# Altium PCB PCB.PcbDoc
Units mm, origin at the board's own origin, x right, y up, seen from the top; angles counter-clockwise.
Board outline 85.3 x 74.4 mm, 2 copper layers (Top Layer, Bottom Layer), stack 1.571 mm thick; 81 components, 60 nets, 260 pads, 57 vias.
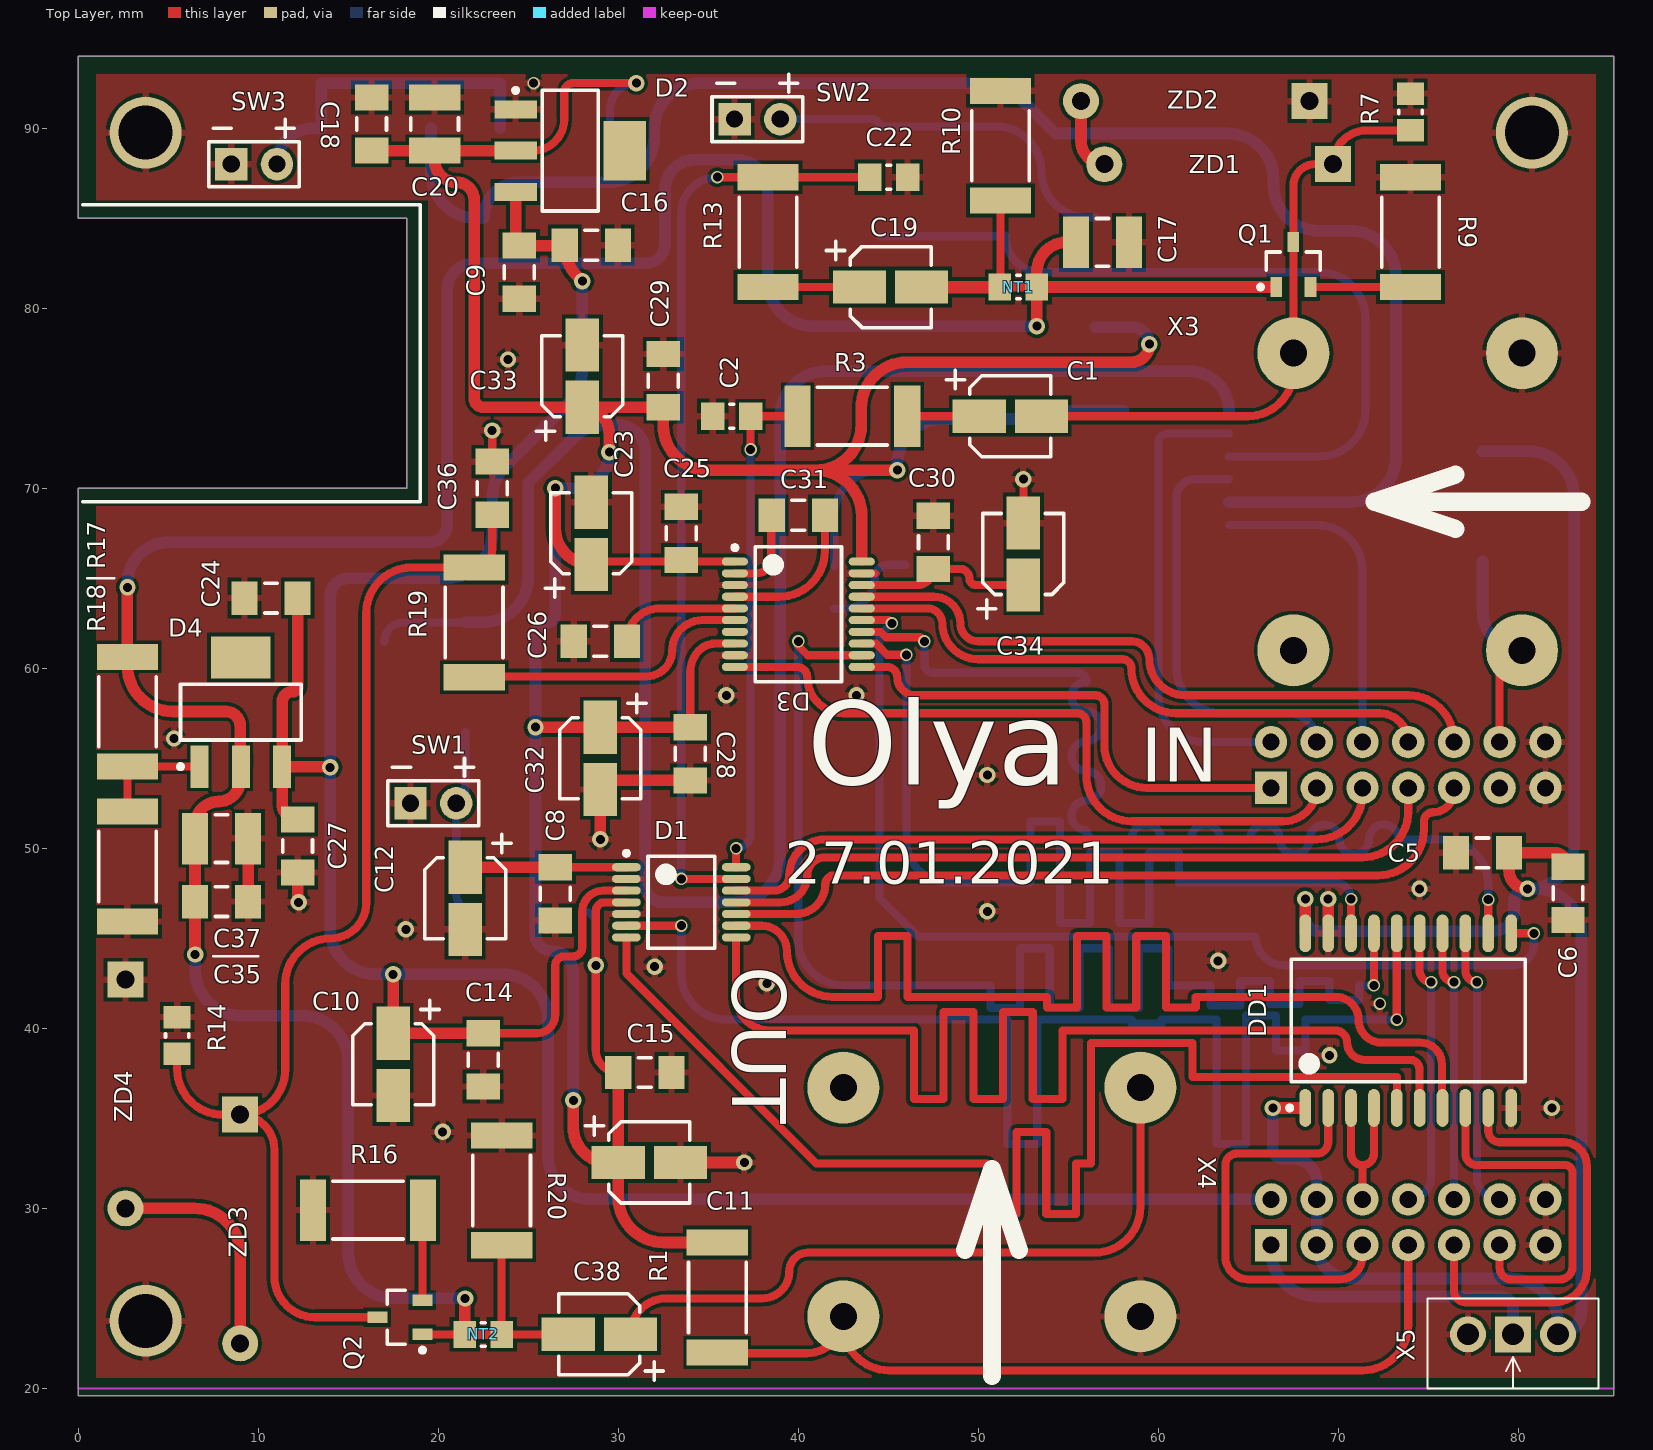
[diagram p0: Top Layer view]
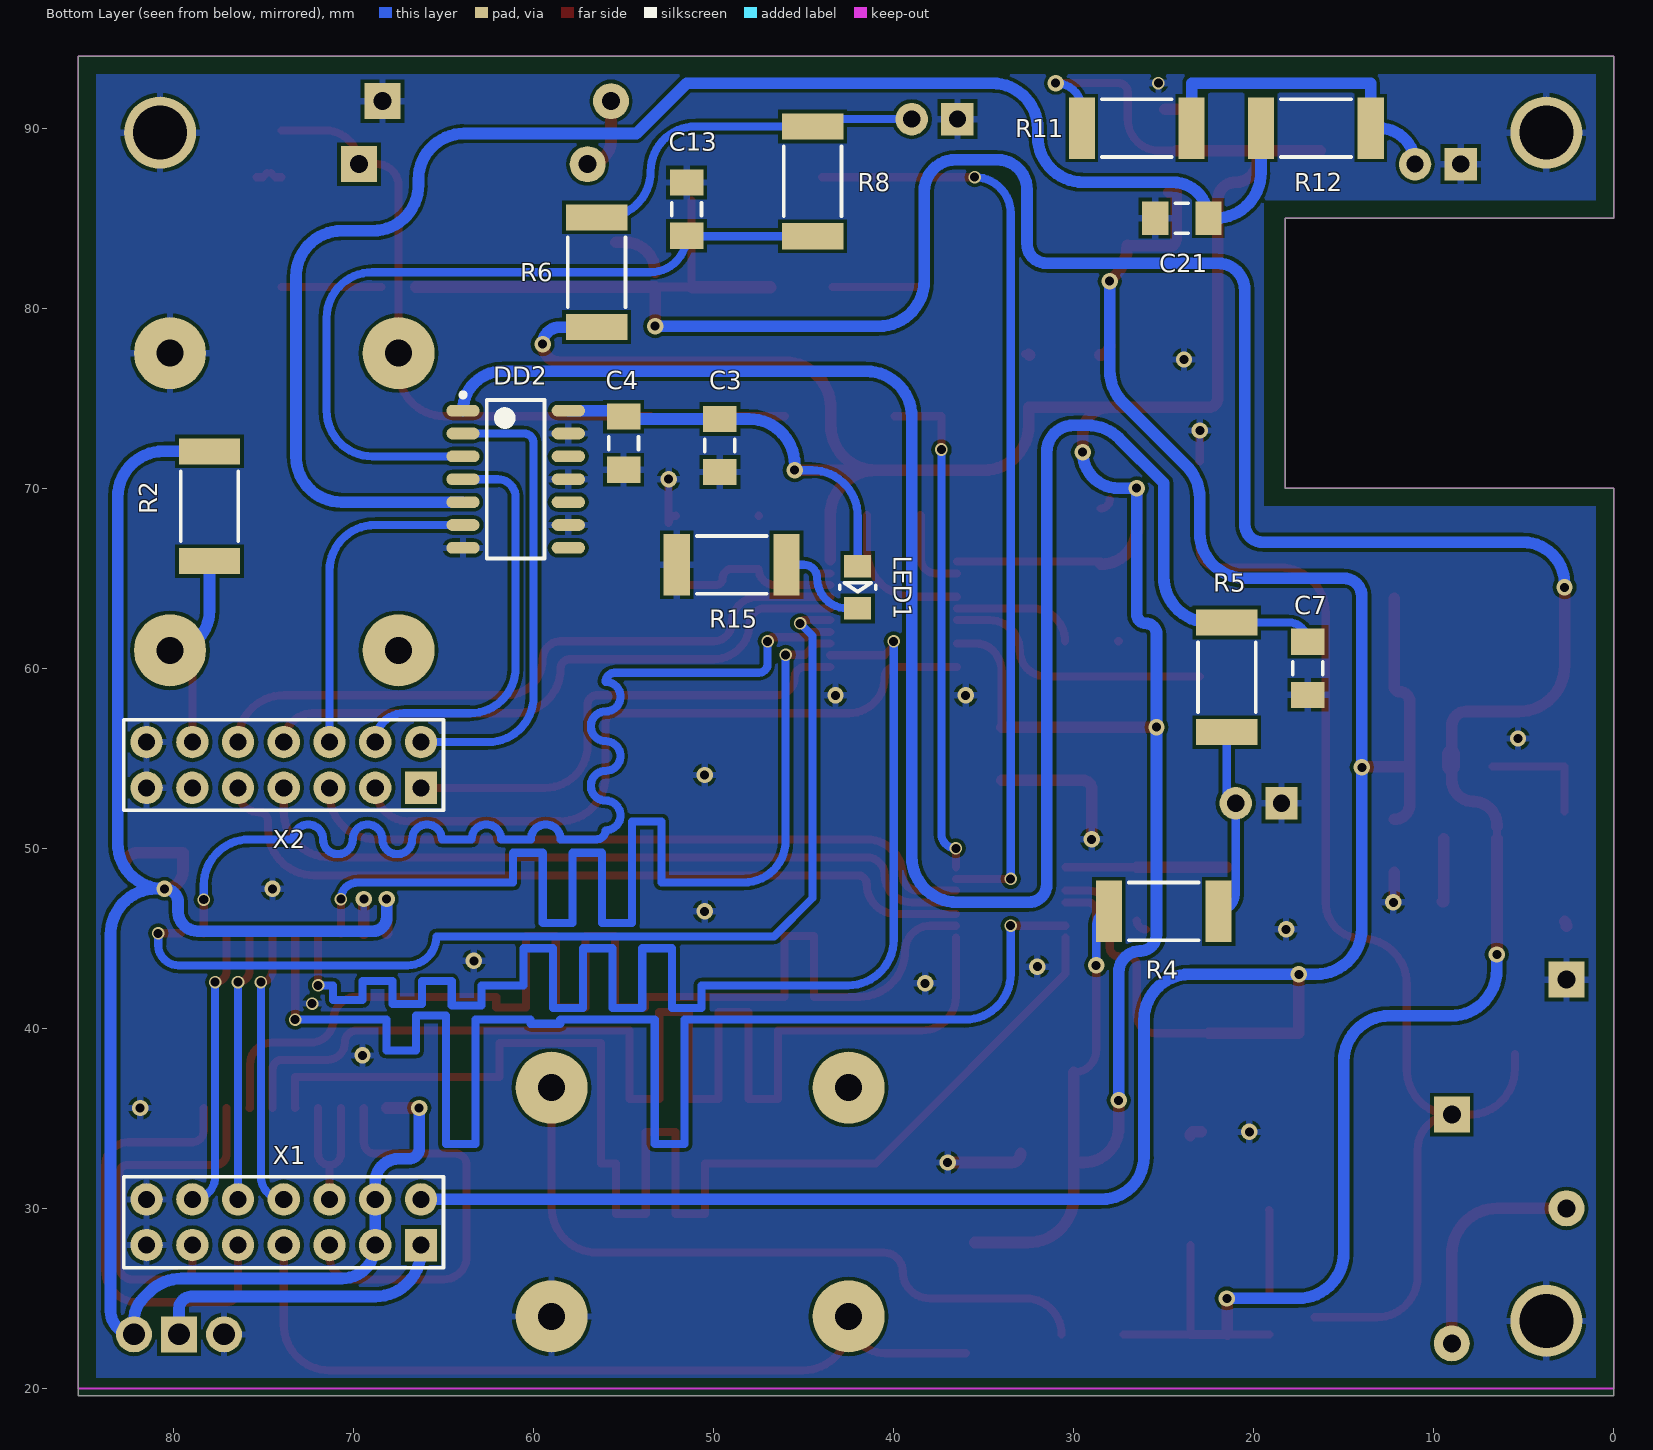
[diagram p1: Bottom Layer view, seen from below]
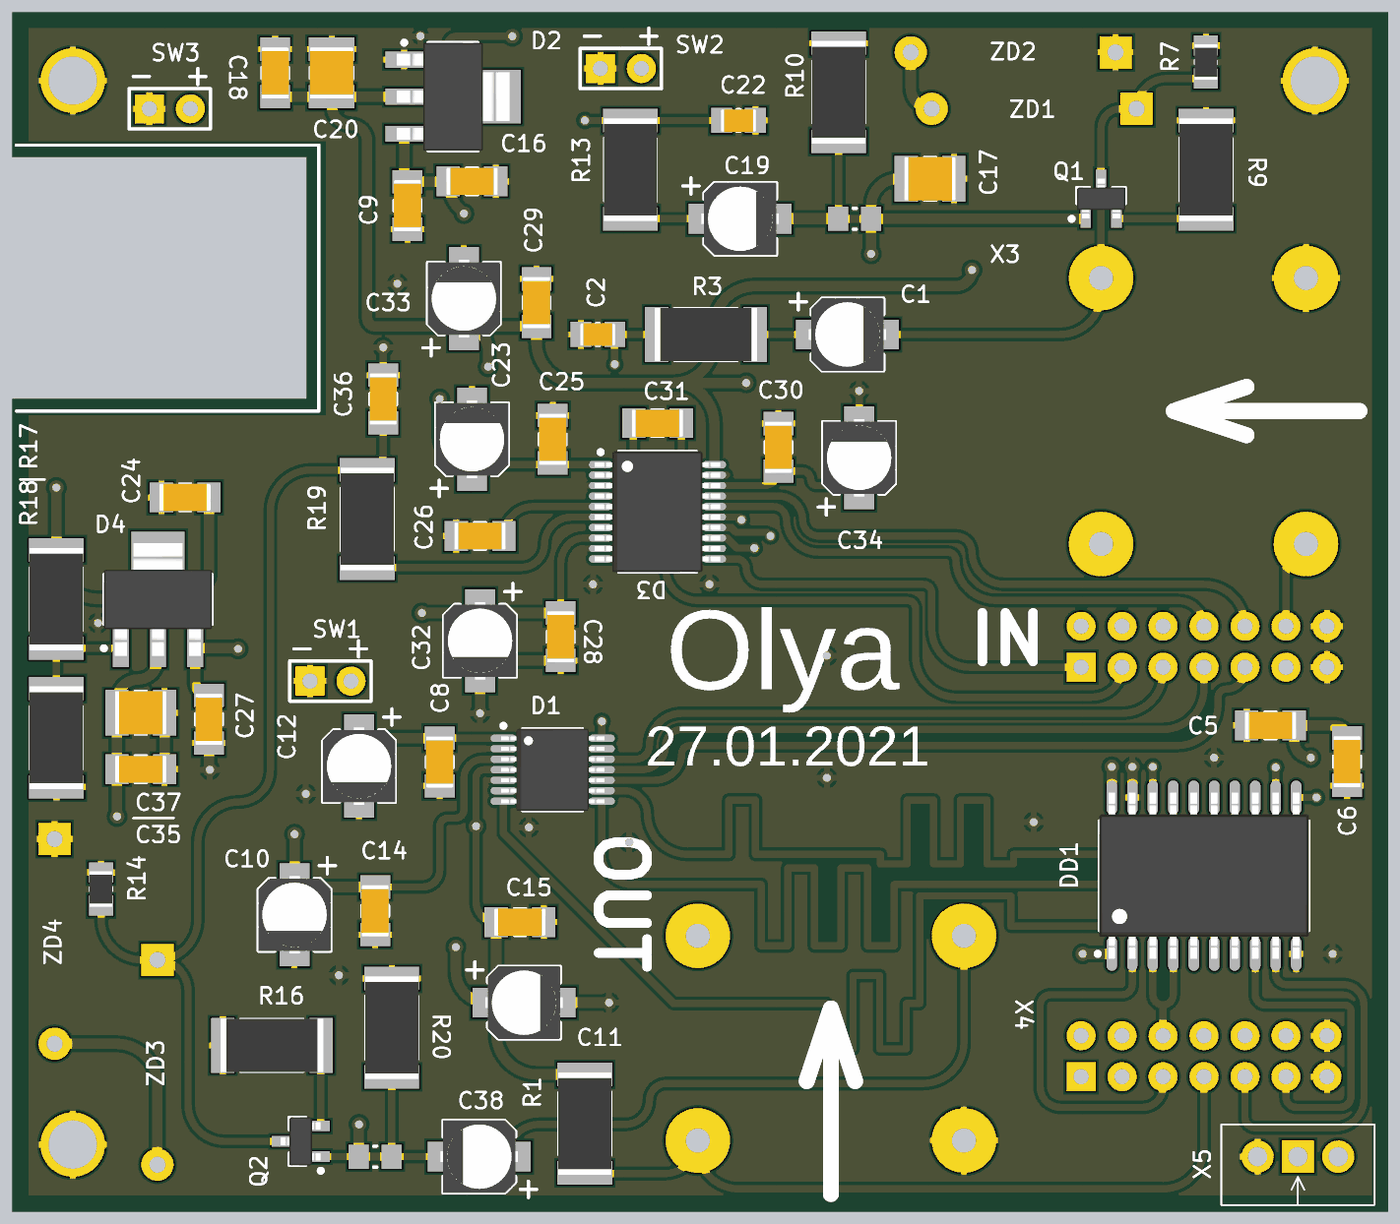
[diagram p2: 3D render of the assembled board from above, using the file's embedded part models]
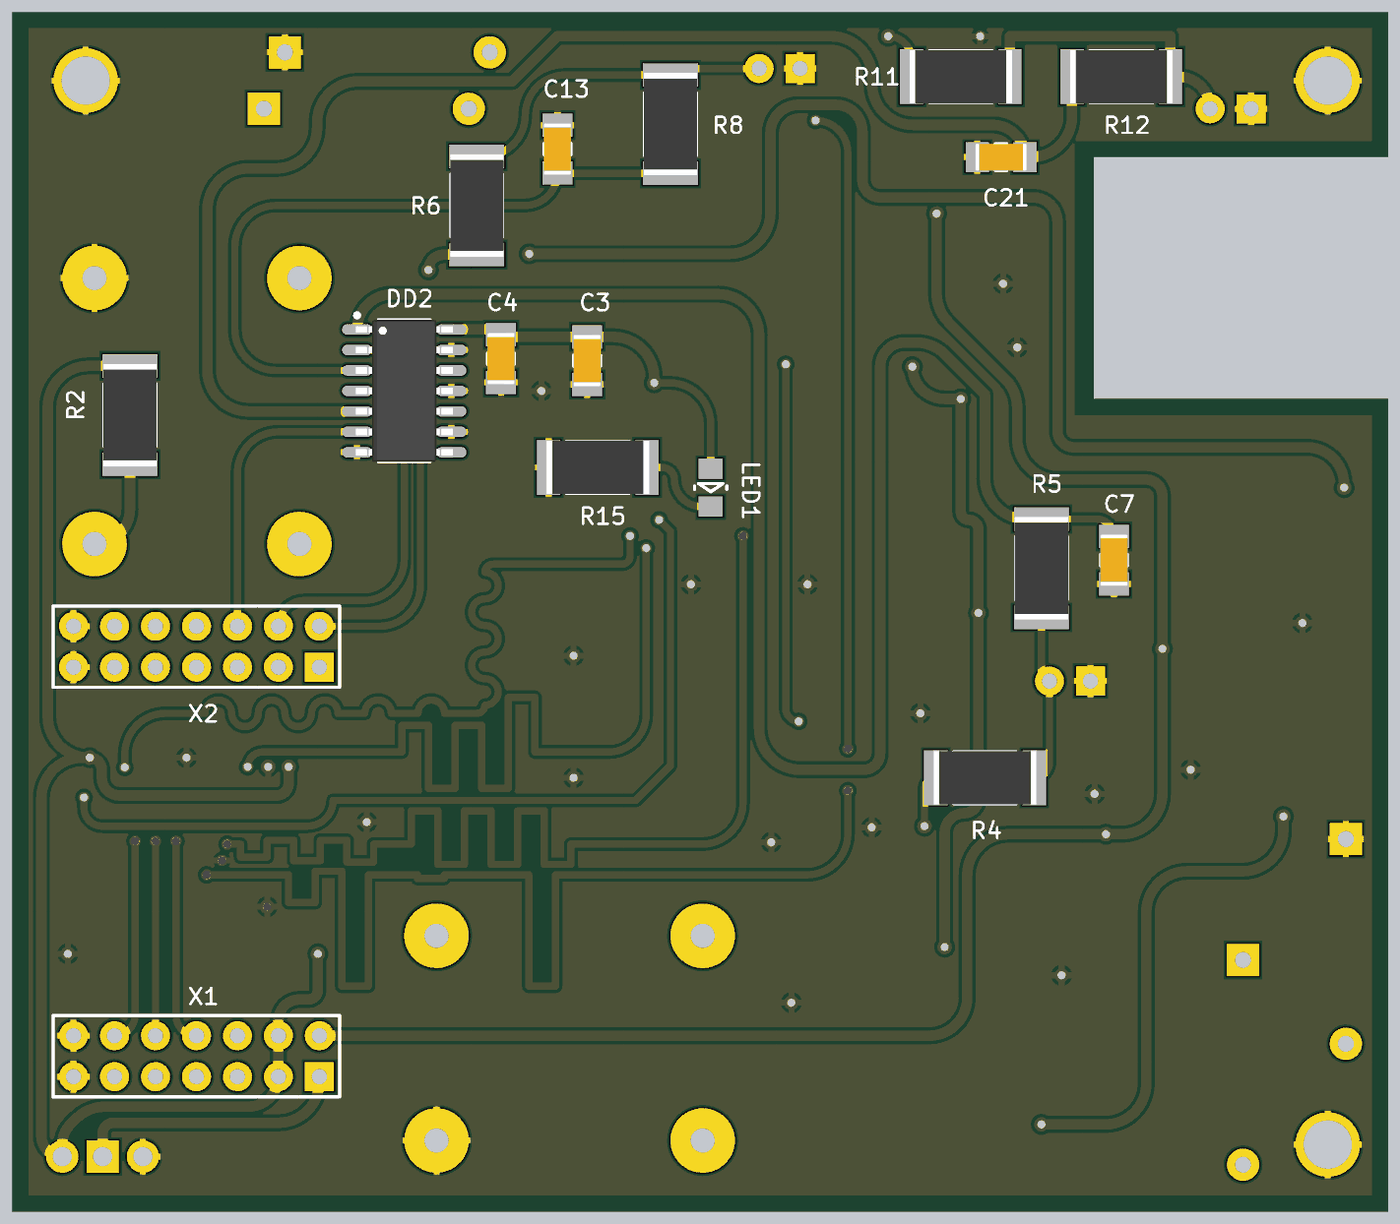
[diagram p3: 3D render of the assembled board from below, using the file's embedded part models]

## Layer stack, top to bottom
Top Solder: solder mask 0.0102, Solder Resist, Dk 3.5
Top Layer: signal copper 0.0356
Dielectric 1: core 1.5, FR-4, Dk 4.2
Bottom Layer: signal copper 0.0356
Bottom Solder: solder mask 0.0102, Solder Resist, Dk 3.5

## Board outline
0,70 18.25,70 18.25,85 0,85 0,94 85.3,94 85.3,19.6 0,19.6

## Design rules (kind name [scope] priority, off if disabled: settings)
Clearance [All] p1: gap=0.2 ignorepadtopadclearanceinfootprint=TRUE
HoleSize [All] p1: absolutevalues=TRUE maxlimit=3 minlimit=0.025 maxpercent=80.000 minpercent=20.000
HoleToHoleClearance [All] p1: gap=0.2 allowstackedmicrovias=TRUE
MinimumSolderMaskSliver [All] p1: minsoldermaskwidth=0.2
PolygonConnect [All] p1: connectstyle=Relief reliefconductorwidth=0.37 reliefentries=4 polygonreliefangle="90 Angle" airgapwidth=0.2
RoutingVias RoutingVias_Big [All] p1: holewidth=1.2 width=1.4 viastyle="Through Hole" minholewidth=1.2 minwidth=1.4 maxholewidth=1.2 maxwidth=1.4
RoutingVias [All] p2: holewidth=0.1 width=0.2 viastyle="Through Hole" minholewidth=0.1 minwidth=0.2 maxholewidth=0.1 maxwidth=0.2
SilkToSilkClearance [All] p1: silktosilkclearance=0.2
SilkToSolderMaskClearance [IsPad] p1: minsilkscreentomaskgap=0.2 clearancetoexposedcopper=TRUE
SolderMaskExpansion [All] p1: expansion=0.102
Width [All] p1: maxlimit=1.25 minlimit=0.45 preferedwidth=0.65 checkconnectedcopper=TRUE
25 further rules are at their usual default settings.

## Components (designator, comment, footprint, x,y, rotation, side; value= is the part's Value field where it differs from the comment)
C1 "1uF" SMD_CAP_4x5.4 51.775,74 r0 top
C2 "0.01uF" C0805 36.3,74 r180 top
C3 "0.1uF" C1206 49.66,72.375 r90 bottom
C4 "10uF" C1206 55,72.5 r90 bottom
C5 "0.1uF" C1206 78,49.75 r0 top
C6 "10uF" C1206 82.75,47.5 r90 top
C7 "0.1uF" C1206 17,60 r90 bottom
C8 "0.1uF" C1206 26.5,47.475 r90 top
C9 "10uF" C1206 24.5,82 r90 top
C10 "10uF" SMD_CAP_4x5.4 17.5,38 r270 top
C11 "10uF" SMD_CAP_4x5.4 31.725,32.55 r0 top
C12 "10uF" SMD_CAP_4x5.4 21.5,47.225 r270 top
C13 "0.1uF" C1206 51.5,85.5 r270 bottom
C14 "0.1uF" C1206 22.5,38.25 r90 top
C15 "0.1uF" C1206 31.475,37.55 r180 top
C16 "0.1uF" C1206 28.5,83.5 r180 top
C17 "47uF" C1210 56.896,83.66 r0 top
C18 "0.1uF" C1206 16.3,90.225 r270 top
C19 "1uF" SMD_CAP_4x5.4 45.125,81.175 r0 top
C20 "47uF" C1210 19.8,90.225 r270 top
C21 "0.1uF" C1206 24,85 r180 bottom
C22 "0.01uF" C0805 45.025,87.275 r180 top
C23 "10uF" SMD_CAP_4x5.4 28.5,67.5 r90 top
C24 "10uF" C1206 10.717,63.897 r0 top
C25 "0.1uF" C1206 33.5,67.5 r90 top
C26 "2.2uF" C1206 29,61.5 r0 top
C27 "0.1uF" C1206 12.192,50.132 r90 top
C28 "0.1uF" C1206 34,55.25 r90 top
C29 "0.1uF" C1206 32.5,75.975 r270 top
C30 "0.1uF" C1206 47.5,67 r270 top
C31 "2.2uF" C1206 40,68.5 r180 top
C32 "10uF" SMD_CAP_4x5.4 29,55 r270 top
C33 "10uF" SMD_CAP_4x5.4 28,76.225 r90 top
C34 "10uF" SMD_CAP_4x5.4 52.5,66.35 r90 top
C35 "0.1uF" C1206 7.968,47.036 r180 top
C36 "0.022uF" C1206 23,70 r90 top
C37 "47uF" C1210 7.968,50.536 r180 top
C38 "1uF" SMD_CAP_4x5.4 28.95,23 r180 top
D1 "PCM1808PWR" TSSOP-14 33.5,47 r0 top
D2 "AMS1117-3.3" SOT223 27.33,88.75 r0 top
D3 "PCM5102APWR" SSOP-20 40,63 r0 top
D4 "AMS1117-ADJ" SOT223 9.033,57.566 r90 top
DD1 "8-ch transceiver" SOIC-20 73.88,40.43 r90 top
DD2 "SCHMITT-TRIGGER INVERTER" SOIC-14 61,70.5 r180 bottom
LED1 "KP-2012SEC" 2.0x1.25mm_SMD_CHIP_LED 42,64.5 r270 bottom
NT1 "NetTie" 0805_NetTie 52.225,81.175 r180 top net-tie
NT2 "NetTie" 0805_NetTie 22.5,23 r0 top net-tie
Q1 "J201" SOT23 67.5,82.425 r90 top
Q2 "J201" SOT23 17.875,23.95 r180 top
R1 "10k" R2512 35.5,25.05 r270 top
R2 "10k" R2512 78,69 r270 bottom
R3 "100" R2512 43,74 r180 top
R4 "10k" R2512 25,46.5 r0 bottom
R5 "1.2k" R2512 21.5,59.5 r90 bottom
R6 "10k" R2512 56.5,82 r270 bottom
R7 "1M" R0805 74,90.9 r270 top
R8 "1.2k" R2512 44.5,87.05 r270 bottom
R9 "1.2k" R2512 74,84.225 r270 top
R10 "10k" R2512 51.225,89.025 r270 top
R11 "10k" R2512 26.5,90 r0 bottom
R12 "1.2k" R2512 16.55,90 r0 bottom
R13 "100" R2512 38.325,84.225 r90 top
R14 "1M" R0805 5.5,39.6 r270 top
R15 "51" R2512 49,65.75 r0 bottom
R16 "1.2k" R2512 16.1,29.9 r0 top
R17 "120" R2512 2.733,57.586 r90 top
R18 "150" R2512 2.733,48.986 r90 top
R19 "470" R2512 22,62.55 r90 top
R20 "10k" R2512 23.525,31 r270 top
SW1 "simple_button" BUTTON_template 18.46,52.5 r0 top
SW2 "simple_button" BUTTON_template 36.46,90.5 r0 top
SW3 "simple_button" BUTTON_template 8.5,88 r0 top
X1 "DS1023-2x7" DS1023-2x7 66.26,27.96 r0 bottom
X2 "DS1023-2x7" DS1023-2x7 66.26,53.36 r0 bottom
X3 "IN" NYS_2152_6.35mm 80.2,77.5 r270 top
X4 "OUT" NYS_2152_6.35mm 59,24 r180 top
X5 "R_var" PTD90 79.7,23 r0 top
ZD1 "1N4733A" DO-41 57,88 r0 top
ZD2 "1N4733A" DO-41 55.7,91.5 r0 top
ZD3 "1N4733A" DO-41 9,22.5 r90 top
ZD4 "1N4733A" DO-41 2.625,30 r90 top

## Footprints (in the part's own frame and the unit in brackets; to place one, negate y for a bottom-side part, rotate by r counter-clockwise, add the part's x,y. Pads: shape width x height; smd on the part's side, far side on the other; paste and mask are expansions set on the pad)
2.0x1.25mm_SMD_CHIP_LED [mm]
  rect 1.25x1.5 smd: 1(-1.175,0) 2(1.175,0)
  silkscreen extent -0.25,-1 0.25,1, body extent -1.1,-0.62 0.9,0.63, height 0.62
0805_NetTie [mm]
  rect 1.25x1.5 smd: 1(-1.025,0) 2(1.025,0)
  Top Layer lines w0.5: 1.025,0 -1.025,0
  silkscreen extent -0.1,-0.65 0.1,0.65
BUTTON_template [mm] "Button_in"
  rect 1.8x1.8 hole 0.95: 1(0,0)
  round 1.8 hole 0.95: 2(2.54,0)
  silkscreen extent -1.25,-1.25 3.78,2.5, body extent 0,0 0,0, height 0.2
C0805 [mm]
  rect 1.3x1.55 smd: 1(-1.05,0) 2(1.05,0)
  silkscreen extent -0.1,-0.67 0.1,0.67, body extent -1.1,-0.7 1.1,0.7, height 0.55
C1206 [mm] "Chip Capacitor, 2-Leads, Body 3,10x1,60mm, IPC Low Density"
  rect 1.45x1.85 smd: 1(-1.475,0) 2(1.475,0)
  silkscreen extent -0.35,-0.82 0.35,0.82, body extent -1.6,-0.85 1.6,0.85, height 0.6
C1210 [mm]
  rect 1.45x2.85 smd: 1(-1.475,0) 2(1.475,0)
  silkscreen extent -0.35,-1.32 0.35,1.33, body extent -1.6,-1.35 1.6,1.35, height 0.6
DO-41 [mm] "500mil pitch"
  round 2 hole 1: 1(0,0)
  rect 2x2 hole 1: 2(12.7,0)
  body extent -0.35,-1.2 13.05,1.2, height 2.53
DS1023-2x7 [mm] "DS1023-2x7"
  rect 1.8x1.8 hole 0.95: 1(0,0)
  round 1.8 hole 0.95: 2(0,-2.54) 3(2.54,0) 4(2.54,-2.54) 5(5.08,0) 6(5.08,-2.54) 7(7.62,0) 8(7.62,-2.54) 9(10.16,0) 10(10.16,-2.54) 11(12.7,0) 12(12.7,-2.54) 13(15.24,0) 14(15.24,-2.54)
  silkscreen extent -1.25,-3.79 16.51,1.25, body extent -1.27,-3.78 16.51,1.25, height 6.22
NYS_2152_6.35mm [mm]
  round 4 hole 1.5: 1(0,-12.7) 2(16.5,-12.7) 3(0,0) 4(16.5,0)
  silkscreen extent 6.75,-8.19 9.75,3.31, body extent -0.85,-19.63 17.35,11.26, height 15.8
PTD90 [mm] "Rvar"
  round 2 hole 1.2: 1(-2.5,0) 3(2.5,0)
  rect 2x2 hole 1.2: 2(0,0)
  silkscreen extent -4.75,-3 4.75,2, body extent -4.75,-20 4.75,2.06, height 11.3
R0805 [mm]
  rect 1.25x1.5 smd: 1(-1.025,0) 2(1.025,0)
  silkscreen extent -0.1,-0.65 0.1,0.65, body extent -1.1,-0.7 1.1,0.7, height 0.55
R2512 [mm]
  rect 1.45x3.4 smd: 1(-3.05,0) 2(3.05,0)
  silkscreen extent -1.95,-1.6 1.95,1.6, body extent -3.18,-1.65 3.18,1.65, height 0.6
SMD_CAP_4x5.4 [mm] "Aluminum Electrolytic Capacitor, Body 4,30x4,30x5,80mm, IPC Low Density"
  rect 2.95x1.85 smd: 1(-1.725,0) 2(1.725,0)
  silkscreen extent -3.56,-2.25 2.25,2.54, body extent -2.4,-2.25 2.4,2.25, height 5.8
SOIC-14 [mm] "SOIC, 14-Leads, Body 8,65x3,90mm, Pitch 1,27mm, IPC Low Density"
  oval 1.85x0.65 smd: 1(-2.925,3.81) 2(-2.925,2.54) 3(-2.925,1.27) 4(-2.925,0) 5(-2.925,-1.27) 6(-2.925,-2.54) 7(-2.925,-3.81) 8(2.925,-3.81) 9(2.925,-2.54) 10(2.925,-1.27) 11(2.925,0) 12(2.925,1.27) 13(2.925,2.54) 14(2.925,3.81)
  silkscreen extent -3.05,-4.4 1.6,4.81, body extent -3,-4.4 3,4.4, height 1.75
SOIC-20 [mm]
  oval 2.1x0.65 smd: 1(-4.85,5.715) 2(-4.85,4.445) 3(-4.85,3.175) 4(-4.85,1.905) 5(-4.85,0.635) 6(-4.85,-0.635) 7(-4.85,-1.905) 8(-4.85,-3.175) 9(-4.85,-4.445) 10(-4.85,-5.715) 11(4.85,-5.715) 12(4.85,-4.445) 13(4.85,-3.175) 14(4.85,-1.905) 15(4.85,-0.635) 16(4.85,0.635) 17(4.85,1.905) 18(4.85,3.175) 19(4.85,4.445) 20(4.85,5.715)
  silkscreen extent -4.97,-6.5 3.4,6.71, body extent -5.15,-6.5 5.15,6.5, height 2.65
SOT23 [mm] "SOT23, 3-Leads, Body 2,90x2,30mm, Pitch 0,95mm, IPC Low Density"
  rect 1.1x0.65 smd: 1(-1.25,0.95) 2(-1.25,-0.95) 3(1.25,0)
  silkscreen extent -1.37,-1.5 0.7,1.95, body extent -1.24,-1.5 1.24,1.5, height 1.1
SOT223 [mm] "SOT223, 4-Leads, Body 6,51x7,00mm (avg), Pitch 2,30mm, IPC Low Density"
  rect 2.35x1 smd: 1(-3.03,2.3) 2(-3.03,0) 3(-3.03,-2.3)
  rect 2.35x3.3 smd: 4(3.03,0)
  silkscreen extent -3.15,-3.35 1.55,3.47, body extent -3.5,-3.35 3.5,3.35, height 1.8
SSOP-20 [mm] "SOP, 20-Leads, Body 7,20x5,30mm, Pitch 0,65mm, IPC High Density"
  oval 1.45x0.45 smd mask+0: 1(-3.525,2.925) 2(-3.525,2.275) 3(-3.525,1.625) 4(-3.525,0.975) 5(-3.525,0.325) 6(-3.525,-0.325) 7(-3.525,-0.975) 8(-3.525,-1.625) 9(-3.525,-2.275) 10(-3.525,-2.925) 11(3.525,-2.925) 12(3.525,-2.275) 13(3.525,-1.625) 14(3.525,-0.975) 15(3.525,-0.325) 16(3.525,0.325) 17(3.525,0.975) 18(3.525,1.625) 19(3.525,2.275) 20(3.525,2.925)
  silkscreen extent -3.65,-3.75 2.4,3.82, body extent -3.9,-3.75 3.9,3.75, height 2
TSSOP-14 [mm] "TSOP, 14-Leads, Body 5,00x4,40mm, Pitch 0,65mm, IPC Low Density"
  oval 1.6x0.45 smd mask+0: 1(-3.05,1.95) 2(-3.05,1.3) 3(-3.05,0.65) 4(-3.05,0) 5(-3.05,-0.65) 6(-3.05,-1.3) 7(-3.05,-1.95) 8(3.05,-1.95) 9(3.05,-1.3) 10(3.05,-0.65) 11(3.05,0) 12(3.05,0.65) 13(3.05,1.3) 14(3.05,1.95)
  silkscreen extent -3.17,-2.55 1.85,2.85, body extent -3.2,-2.55 3.2,2.55, height 1.2

## Part data
C1 C19 C38: library part JCK1H010M040054, "ECAP SMD, 1 uF, 50V, 105°C, 20% 4x5.4mm"
C2 C22: library part GRM2195C1H103J, "0.01 uF NPO 50V 5% 0805"
C3 C5 C7 C8 C13 C14 C15 C16 C18 C21 C25 C27 C28 C29 C30 C35: library part GRM319R72A104KA01D, "SMD 0.1 uF X7R 10%100V 1206"
C4 C6 C9 C24: library part GRM31CR71E106KA12L*, "SMD 10 uF X7R 10% 25V 1206"
C10 C11 C12 C23 C32 C33 C34: library part JCK1E100M040054, "ECAP SMD, 10uF, 25 V, 105°C, 20% 4x5.4mm"
C17 C20 C37: library part GRM32ER61C476KE15K, "SMD 1210 X5R 47uF 16V 10%"
C26 C31: library part GRM31CR71H225KA88**L, "SMD 2.2ìêÔ,X7R 50Â, 10%, 1206"
C36: library part GRM319R71H223KA01D, "SMD 0.022uF X7R 50V 10% 1206 (22nF)"
D2: library part AMS1117_3.3
DD1: library part SN74LVC245ADW
DD2: library part SN74HC14D
R1 R2 R4 R6 R10 R11 R20: library part RC0805FR-0710KL, Model=RC0805FR
R3 R13: library part RC2512JR-07100RL, Model=RC2512JR
R5 R8 R9 R12 R16: library part RC2512FR-071K2L, Model=RC2512FR
R7 R14: library part RC0805JR-071ML, Model=RC0805JR
R15: library part RC2512JR-0751RL, Model=RC2512JR
R17: library part RC2512FR-07120RL, Model=RC2512FR
R18: library part RC2512FR-07150RL, Model=RC2512FR
R19: library part RC2512FR-07470RL, Model=RC2512FR
X1 X2: library part "PBD-14 (DS1023-2x7)", "PBD-14 (DS1023-2x7)", 13=GND, 14=GND
  X1: 1=ANAIN1_3, 2=5V_Ext, 3=3V3_Int, 4=NC, 5=IO6_89_PullDwn(CLK), 6=IO6_90_PullDwn(CLK), 7=IO6_91_PullDwn(CLK), 8=IO_6_92_PullDwn, 9=IO_6_93, 10=IO_6_96(DPCLK3), 11=IO_6_97, 12=IO_6_98(DPCLK2)
  X2: 1=IO_7_119, 2=IO_7_118, 3=IO_7_112, 4=IO_7_113, 5=IO_7_110, 6=IO_7_111, 7=IO_6_105, 8=IO_6_106, 9=IO_6_101, 10=IO_6_102, 11=IO_6_99, 12=IO_6_100
X3 X4: library part NYS_2152_6.35mm, "Jack 6.35mm MONO", 1=SIGNAL, 2=SIGNAL_SYNC, 3=GND, 4=GND_SYNC
X5: library part Rvar_blank, 1=VCC, 2=VAR, 3=GND

## Free pads (board coordinates)
  round 4 hole 3: 0(3.75,23.75) 0(3.75,89.75) 0(80.75,89.75)

## Via types
v1: diameter 0.9/0.9 (per signal layer), hole 0.5, Top Layer to Bottom Layer, 38 vias
v2: diameter 0.7, hole 0.5, Top Layer to Bottom Layer, 19 vias

## Nets (pads, with @x,y where several pads share a name; then routed paths per layer and width w, separated by ;. In a path a pad name is that pad's centre, name@x,y a point inside that pad or via, vN(x,y) a via of type N, cw(c..) or ccw(c..) an arc to the next point about the centre after c; other vN are vias at no path point)
2V8: C17.1 C35.2 C37.2 D4.2 NT1.1 NT2.1 Q1.1 Q2.1 R17.2 | length 160.4
  Top Layer w0: D4.2@9.008,55.386 D4.2@9.033,55.361
  Top Layer w0.45: C37.2 C37.2@6.493,51.204 ; D4.2@9.033,53.744 D4.2 ; Q2.1 NT2.1
  Top Layer w0.65: v1(2.733,64.5) R17.2 2.733,60.14 ccw(c5.273,60.14) 5.273,57.6 8.2,57.6 cw(c8.2,56.8) 9,56.8 9,53.8 cw(c7.8,53.8) 7.8,52.6 ccw(c7.8,51.293) 6.493,51.293 C37.2@6.493,51.204 ; C37.2 C35.2 6.493,44.107 v1(6.5,44.1) ; NT2.1 21.475,24.975 cw(c21.5,24.975) v1(21.5,25) ; v1(53.25,79) NT1.1 Q1.1 ; 53.25,82.004 cw(c54.906,82.004) 54.906,83.66 C17.1
  Top Layer w1: D4.2 D4.2@9.033,55.236
  Bottom Layer w0.65: v1(2.733,64.5) 2.733,64.693 cw(c5.04,64.693) 5.04,67 19.5,67 ccw(c19.5,68) 20.5,68 20.5,81 cw(c22,81) 22,82.5 31.5,82.5 ccw(c31.5,83.599) 32.599,83.599 32.599,86.599 cw(c34.25,86.599) 34.25,88.25 36.55,88.25 cw(c36.55,86.5) 38.3,86.5 38.3,81.54 ccw(c40.84,81.54) 40.84,79 v1(53.25,79) ; v1(6.5,44.1) 6.5,43.24 ccw(c9.04,43.24) 9.04,40.7 12.46,40.7 cw(c12.46,38.16) 15,38.16 15,27.54 ccw(c17.54,27.54) 17.54,25 v1(21.5,25)
3V3: C3.2 C4.2 C11.1 C15.2 C18.2 C20.2 C23.1 C25.1 C28.2 C29.2 C32.1 C33.1 D1.4 D2.2 D3.1 D3.8 D3.20 DD2.14 LED1.1 R1.1 R4.2 R6.2 R11.2 | length 223.1
  Top Layer w0.45: D2.2 25.25,88.75 ccw(c25.25,90.5) 27,90.5 27,92 cw(c27.5,92) 27.5,92.5 v1(31,92.5) ; C23.1@28.5,65.925 D3.1 ; C15.2 cw(c30,38.8) 28.75,38.8 v1(28.75,43.5) 28.75,46.5 cw(c29.25,46.5) 29.25,47 D1.4 ; C28.2 34,59.793 cw(c35.707,59.793) 34.5,61 cw(c35.405,60.095) 35.405,61.375 D3.8 ; D3.20@43.5,66.039 ccw(c43.585,66.039) D3.20@43.525,65.979
  Top Layer w0.65: C18.2 C20.2 ; D2.2 C20.2 ; v1(25.4,56.725) C32.1 C28.2 ; v1(26.5,70) 26.5,67.775 ccw(c28.5,67.775) C23.1 ; v1(27.5,36) 27.5,34.5 ccw(c29.45,34.5) 29.45,32.55 C11.1 ; v1(29.5,72) 29.5,73 ccw(c28,73) C33.1 ; C15.2 C11.1 ; R1.1 32.54,28.1 cw(c32.54,30.64) 30,30.64 C11.1 ; D3.20@43.525,66.039 43.525,68.46 ccw(c40.985,68.46) 40.985,71 ; v1(45.5,71) 40.985,71 ; v1(59.5,78) cw(c58.5,78) 58.5,77 46.04,77 ccw(c46.04,74.46) 43.5,74.46 43.5,73.515 cw(c40.985,73.515) 40.985,71 ; C20.2 19.8,88.2 ccw(c21,88.2) 21,87 cw(c21,86) 22,86 22,75 ccw(c22.5,75) 22.5,74.5 C33.1 ; C33.1 C29.2 32.5,73.5 ccw(c35,73.5) 35,71 40.985,71
  Bottom Layer w0.45: R4.2 cw(c28.05,45.8) 28.75,45.8 v1(28.75,43.5) ; R11.2 29.55,91.05 cw(c31,91.05) v1(31,92.5) ; LED1.1 42,68.46 cw(c44.54,68.46) 44.54,71 v1(45.5,71)
  Bottom Layer w0.65: v1(27.5,36) 27.5,43.1 ccw(c26.3,43.1) 26.3,44.3 cw(c26.3,45.2) 25.4,45.2 v1(25.4,56.725) 25.4,61.9 cw(c26,61.9) 26,62.5 ccw(c26,63) 26.5,63 v1(26.5,70) 27.5,70 ccw(c27.5,72) v1(29.5,72) ; v1(45.5,71) 45.5,71.31 cw(c48.04,71.31) 48.04,73.85 C3.2 54.375,73.85 ccw(c54.375,73.975) 54.5,73.975 cw(c54.835,73.975) 54.835,74.31 DD2.14 ; R6.2 58.55,78.95 cw(c58.55,78) v1(59.5,78)
3V3_INT: C5.2 C6.2 DD1.1 DD1.20 R2.1 X1.3 X1.4 X5.3 | length 108.2
  Top Layer w0.65: v1(66.355,35.58) DD1.1 ; DD1.20 v1(68.165,47.18) ; v1(80.5,47.75) cw(c80.5,48.775) 79.475,48.775 C5.2 81.975,49.75 cw(c81.975,48.975) C6.2
  Bottom Layer w0.65: v1(66.355,35.58) 66.355,33.327 ccw(c66.932,33.327) 66.932,32.75 67.5,32.75 cw(c67.5,31.45) 68.8,31.45 X1.4 X1.3 ccw(c70.66,27.96) 70.66,26.1 79.548,26.1 cw(c79.548,23.56) 81.344,25.356 81.7,25 cw(c80.493,23.793) 82.2,23.793 X5.3 ccw(c82.2,24.3) 83.5,24.3 83.5,45.21 ccw(c80.96,45.21) 80.96,47.75 v1@80.56,47.75 ; v1(68.165,47.18) 68.165,46.145 ccw(c68.91,46.145) 68.91,45.4 78.65,45.4 ccw(c78.65,46.5) 79.75,46.5 79.75,47 cw(c80.5,47) v1(80.5,47.75) v1@80.56,47.75 ; R2.1 80.56,72.05 cw(c80.56,69.51) 83.1,69.51 83.1,50.29 cw(c80.56,50.29) v1@80.56,47.75
5V: C9.2 C10.1 C14.2 C16.2 C24.2 C27.2 D1.3 D2.3 D4.3 X1.2 | length 156.4
  Top Layer w0.45: C14.2 25.46,39.725 ccw(c25.46,40.765) 26.5,40.765 26.5,43.5 cw(c27,43.5) 27,44 27.5,44 ccw(c27.5,44.5) 28,44.5 28,46.479 cw(c29.171,46.479) 29.171,47.65 D1.3
  Top Layer w0.65: C27.2 cw(c12.192,52.466) 11.333,52.466 D4.3 ; C24.2 12.192,58.992 cw(c11.9,58.992) 11.9,58.7 ccw(c11.9,58.133) 11.333,58.133 D4.3 ; v1(14,54.5) ccw(c13.964,54.5) 13.964,54.536 D4.3 ; v1(17.5,43) C10.1 C14.2 ; D2.3@24.705,86.45 D2.3 24.3,83.958 ccw(c24.983,83.958) C9.2 26.965,83.475 ccw(c26.965,83.56) C16.2 ccw(c29.5,83.5) 27.75,81.75 v1(28,81.5)
  Bottom Layer w0.65: v1(28,81.5) 28,76.552 cw(c25.46,76.552) 27.256,74.756 23.744,71.244 ccw(c25.54,69.448) 23,69.448 23,67.54 cw(c20.46,67.54) 20.46,65 15,65 ccw(c15,64) 14,64 v1(14,54.5) 14,45.54 ccw(c16.54,45.54) 16.54,43 v1(17.5,43) 23.56,43 cw(c23.56,40.46) 26.1,40.46 26.1,32.86 ccw(c28.46,32.86) 28.46,30.5 X1.2
ADC.BCK: D1.8 DD1.6 | length 72.7
  Top Layer w0.45: D1.8 36.55,41.75 ccw(c38.417,41.75) 38.417,39.883 38.75,39.883 46.425,39.883 46.425,36.071 48.075,36.071 48.075,39.883 48.075,40.912 49.725,40.912 49.725,39.883 49.725,36.071 51.375,36.071 51.375,39.883 51.375,40.912 53.025,40.912 53.025,39.883 53.025,36.071 54.675,36.071 54.675,39.883 55.5,39.883 69.812,39.883 cw(c69.812,39.21) 70.485,39.21 ccw(c71.445,39.21) 71.445,38.25 74,38.25 cw(c74,37.75) 74.5,37.75 74.5,35.58 DD1.6
ADC.BCK_int: DD1.14 X1.10 | length 15.1
  Top Layer w0.45: DD1.14 75.785,43.2 ccw(c76.42,43.2) v2(76.42,42.565)
  Bottom Layer w0.45: X1.10 v2(76.42,42.565)
ADC.DOUT: D1.9 DD1.7 | length 69.8
  Top Layer w0.45: D1.9 37.96,45.7 cw(c37.96,44.29) 39.37,44.29 ccw(c41.91,44.29) 41.91,41.75 42.5,41.75 44.425,41.75 44.425,45.12 46.075,45.12 46.075,41.75 46.9,41.75 53.825,41.75 53.825,41.163 55.475,41.163 55.475,41.75 55.475,45.12 57.125,45.12 57.125,41.75 57.125,41.163 58.775,41.163 58.775,41.75 58.775,45.12 60.425,45.12 60.425,41.75 60.425,41.163 62.075,41.163 62.075,41.75 62.9,41.75 62.925,41.75 63.75,41.75 69.85,41.75 cw(c69.85,40.48) 71.12,40.48 ccw(c72.39,40.48) 72.39,39.21 74.54,39.21 cw(c74.54,38) 75.75,38 75.75,35.615 ccw(c75.785,35.615) DD1.7
ADC.DOUT_int: DD1.13 X1.12 | length 15.9
  Top Layer w0.45: DD1.13 77.055,43.2 ccw(c77.69,43.2) v2(77.69,42.565)
  Bottom Layer w0.45: v2(77.69,42.565) 77.69,31.77 ccw(c78.96,31.77) X1.12
ADC.FMT: D1.12 X2.5 | length 38.2
  Top Layer w0.45: D1.12 38.65,47.65 ccw(c38.65,48.5) 39.5,48.5 cw(c41.5,48.5) 41.5,50.5 68.8,50.5 ccw(c68.8,53.04) 71.34,53.04 X2.5
ADC.LRCK: D1.7 DD1.5 | length 74.2
  Top Layer w0.45: D1.7 30.45,43.05 41,32.5 49.403,32.5 50.475,32.5 50.475,29.69 52.125,29.69 52.125,32.5 52.125,34.232 53.775,34.232 53.775,32.5 53.775,29.69 55.425,29.69 55.425,32.5 56.25,32.5 56.25,39.179 61.901,39.179 61.901,37.305 73.25,37.305 73.25,35.58 DD1.5
ADC.LRCK_int: DD1.15 X1.8 | length 15.9
  Top Layer w0.45: DD1.15 74.515,43.2 ccw(c75.15,43.2) v2(75.15,42.565)
  Bottom Layer w0.45: X1.8 ccw(c73.88,31.77) 75.15,31.77 v2(75.15,42.565)
ADC.MODE0: D1.10 X2.9 | length 44.2
  Top Layer w0.45: D1.10 39.85,46.35 ccw(c39.85,48) 41.5,48 cw(c42,48) 42,48.5 72.21,48.5 ccw(c72.21,51.04) 74.75,51.04 74.75,51.5 cw(c75.25,51.5) 75.25,52 ccw(c75.25,53.17) 76.42,53.17 X2.9
ADC.MODE1: D1.11 X2.7 | length 41.5
  Top Layer w0.45: D1.11 39,47 ccw(c39,48.5) 40.5,48.5 cw(c41.5,48.5) 41.5,49.5 71.34,49.5 ccw(c71.34,52.04) 73.88,52.04 X2.7
ADC.SCKI: D1.6 DD1.16 | length 83.7
  Top Layer w0.45: D1.6 v2(33.5,45.7) ; v2(73.245,40.48) DD1.16
  Bottom Layer w0.45: v2(33.5,45.7) 33.5,43.02 ccw(c36.04,43.02) 36.04,40.48 36.75,40.48 40.25,40.48 44.75,40.48 48.463,40.48 51.625,40.48 51.625,33.57 53.275,33.57 53.275,40.48 54.925,40.48 55.75,40.48 58.525,40.48 58.525,40.255 60.175,40.255 60.175,40.48 61,40.48 61.575,40.48 63.225,40.48 63.225,33.57 64.875,33.57 64.875,40.48 64.875,40.705 66.525,40.705 66.525,40.48 66.525,38.758 68.175,38.758 68.175,40.48 69,40.48 v2(73.245,40.48)
ADC.SCKI_ext: DD1.3 DD1.4 X1.6 | length 9
  Top Layer w0.45: DD1.3 70.705,33.04 ccw(c71.34,33.04) 71.34,32.405 ; X1.6 71.34,32.405 ; DD1.4 71.975,33.04 cw(c71.34,33.04) 71.34,32.405
ANALOG.IN: C1.2 Q1.3 R7.2 X3.1 ZD1.2 | length 34
  Top Layer w0.45: C1.2 64.96,74 ccw(c64.96,76.54) 67.5,76.54 X3.1 Q1.3 67.5,86.8 cw(c68.7,86.8) 68.7,88 ZD1.2 cw(c71.575,88) 71.575,89.875 R7.2
ANALOG.IN.AMP: C19.2 NT1.2 R10.2 | length 9.1
  Top Layer w0.45: NT1.2@51.225,81.175 R10.2
  Top Layer w0.7: C19.2 NT1.2
ANALOG.IN.AMP.FILT: C22.2 D1.13 R13.2 | length 51.6
  Top Layer w0.45: v2(33.5,48.3) D1.13 ; v2(35.5,87.275) R13.2 C22.2
  Bottom Layer w0.45: v2(33.5,48.3) 33.5,84.592 33.5,85.275 cw(c35.5,85.275) v2(35.5,87.275)
ANALOG.IN.FILT: C2.1 D1.14 R3.2 | length 28.1
  Top Layer w0.45: D1.14 v2(36.55,50) ; v2(37.35,72.15) C2.1 R3.2
  Bottom Layer w0.45: v2(36.55,50) ccw(c36.55,50.8) 37.35,50.8 v2(37.35,72.15)
ANALOG.IN.SYNC: R2.2 X2.12 X3.4 | length 13.2
  Top Layer w0.45: X2.12 78.96,59.76 cw(c80.2,59.76) X3.4 X3.4@80.2,59.8
  Bottom Layer w0.65: R2.2 78,63.2 ccw(c80.2,63.2) X3.4
ANALOG.OUT: C36.1 Q2.3 R14.2 R19.2 ZD3.2 | length 65.7
  Top Layer w0.45: R14.2 5.5,37.74 ccw(c8.04,37.74) 8.04,35.2 ZD3.2@8.96,35.2 ; Q2.3 13.165,23.95 cw(c13.165,26.215) 10.9,26.215 10.9,33.26 ccw(c8.96,33.26) ZD3.2@8.96,35.2 ; C36.1 23,66.6 cw(c22,66.6) R19.2 18.54,65.6 ccw(c18.54,63.06) 16,63.06 16,46.96 cw(c14.04,46.96) 14.04,45 ccw(c14.04,42.46) 11.5,42.46 11.5,37.7 cw(c9,37.7) ZD3.2 ZD3.2@8.96,35.2
ANALOG.OUT.AMP: C38.2 NT2.2 R20.2 | length 8.6
  Top Layer w0.45: R20.2 NT2.2 C38.2
ANALOG.OUT.AMP.FILT: C38.1 X4.1 | length 39
  Top Layer w0.45: C38.1 cw(c32.675,23) 32.675,25 38,25 ccw(c38,26.5) 39.5,26.5 cw(c40.54,26.5) 40.54,27.54 56.46,27.54 ccw(c56.46,30.08) 59,30.08 X4.1
ANALOG.OUT.SYNC: R1.2 X1.7 X4.4 | length 46.8
  Top Layer w0.45: R1.2@36,21.95 40.45,21.95 ccw(c40.45,24) X4.4 42.5,23.54 ccw(c45.04,23.54) 45.04,21 71.34,21 ccw(c71.34,23.54) 73.88,23.54 X1.7
BTN1_IN: C7.2 DD2.1 R5.2 | length 109.4
  Bottom Layer w0.45: C7.2 cw(c18.075,61.475) 18.075,62.55 R5.2
  Bottom Layer w0.65: R5.2 22.46,62.55 ccw(c22.46,65.09) 25,65.09 25,70.293 27.463,72.756 cw(c29.259,70.96) 29.259,73.5 30,73.5 cw(c30,72) 31.5,72 31.5,48 ccw(c32.5,48) 32.5,47 36.46,47 ccw(c36.46,49.54) 39,49.54 39,73.96 cw(c41.54,73.96) 41.54,76.5 61.735,76.5 cw(c61.735,74.31) DD2.1
BTN1_OUT: DD2.2 X2.2 | length 26
  Bottom Layer w0.45: DD2.2 60.54,73.04 ccw(c60.54,72.5) 60,72.5 60,58.44 ccw(c62.54,58.44) 62.54,55.9 X2.2
BTN2_IN: C13.2 DD2.3 R8.2 | length 43.8
  Bottom Layer w0.45: R8.2 51.475,84 ccw(c51.475,84.025) C13.2 ccw(c53.525,84.025) 53.525,82 68.96,82 cw(c68.96,79.46) 71.5,79.46 71.5,74.31 cw(c68.96,74.31) 68.96,71.77 DD2.3
BTN2_OUT: DD2.4 X2.4 | length 23.1
  Bottom Layer w0.45: DD2.4 62,70.5 ccw(c62,69.5) 61,69.5 61,60.04 ccw(c63.54,60.04) 63.54,57.5 67.2,57.5 cw(c67.2,55.9) X2.4
BTN3_IN: C21.2 DD2.5 R12.2 | length 88.5
  Bottom Layer w0.65: R12.2 19.6,87.54 ccw(c22.14,87.54) 22.14,85 C21.2 cw(c24.525,85) 24.525,87 29.46,87 ccw(c29.46,89.54) 32,89.54 32,89.96 cw(c34.54,89.96) 34.54,92.5 51.5,92.5 54.3,89.7 63.86,89.7 cw(c63.86,87.16) 66.4,87.16 66.4,86.84 ccw(c68.94,86.84) 68.94,84.3 70.66,84.3 cw(c70.66,81.76) 73.2,81.76 73.2,71.77 cw(c70.66,71.77) 70.66,69.23 DD2.5
BTN3_OUT: DD2.6 X2.6 | length 18.4
  Bottom Layer w0.45: DD2.6 68.8,67.96 cw(c68.8,65.42) 71.34,65.42 X2.6
DAC.BCK: D3.13 DD1.18 | length 63.9
  Top Layer w0.45: D3.13 44.31,61.375 44.935,60.75 v2(46,60.75) ; DD1.18 v2(70.705,47.18)
  Bottom Layer w0.45: v2(46,60.75) 46,50.44 ccw(c48.34,50.44) 48.34,48.1 52.07,48.1 52.895,48.1 52.895,51.488 54.545,51.488 54.545,48.1 54.545,45.845 56.195,45.845 56.195,48.1 56.195,49.755 57.845,49.755 57.845,48.1 57.845,45.845 59.495,45.845 59.495,48.1 59.495,49.755 61.145,49.755 61.145,48.1 65.75,48.1 69.615,48.1 69.785,48.1 cw(c69.785,47.18) v2(70.705,47.18)
DAC.BCK_ext: DD1.2 X1.5 | length 23.1
  Top Layer w0.45: DD1.2 69.435,33.675 cw(c68.8,33.675) 68.8,33.04 64.355,33.04 ccw(c64.355,32.405) 63.72,32.405 63.72,27.325 ccw(c64.99,27.325) 64.99,26.055 70.07,26.055 ccw(c70.07,27.325) 71.34,27.325 X1.5
DAC.DEMP: D3.10 X2.3 | length 39.6
  Top Layer w0.45: D3.10 39.925,60.075 cw(c39.925,59.5) 40.5,59.5 ccw(c42.5,59.5) 42.5,57.5 55.5,57.5 cw(c55.5,57) 56,57 56,54.04 ccw(c58.54,54.04) 58.54,51.5 66.94,51.5 ccw(c66.94,53.36) X2.3
DAC.DIN: D3.14 DD1.12 | length 60.8
  Top Layer w0.45: D3.14 44.579,62.025 44.879,61.725 46.775,61.725 v2(47,61.5) ; DD1.12 v2(78.325,47.15)
  Bottom Layer w0.45: v2(47,61.5) 47,60.25 ccw(c47.5,60.25) 47.5,59.75 55.5,59.75 cw(c55.5,59.25) 56,59.25 ccw(c56,58.425) 56,57.6 cw(c56,56.775) 56,55.95 ccw(c56,55.125) 56,54.3 cw(c56,53.475) 56,52.65 ccw(c56,51.825) 56,51 ccw(c56.5,51) 56.5,50.5 57,50.5 58.5,50.5 cw(c59.325,50.5) 60.15,50.5 61.8,50.5 cw(c62.625,50.5) 63.45,50.5 65.1,50.5 cw(c65.925,50.5) 66.75,50.5 ccw(c67.575,50.5) 68.4,50.5 cw(c69.225,50.5) 70.05,50.5 ccw(c70.875,50.5) 71.7,50.5 cw(c72.525,50.5) 73.35,50.5 75,50.5 75.785,50.5 cw(c75.785,47.96) 78.325,47.96 v2(78.325,47.15)
DAC.DIN_ext: DD1.8 X1.11 | length 20.4
  Top Layer w0.45: DD1.8 77.055,33.04 ccw(c77.69,33.04) 77.69,32.405 82.595,32.405 cw(c82.595,32) 83,32 83,26.75 cw(c82.305,26.75) 82.305,26.055 79.595,26.055 cw(c79.595,26.69) 78.96,26.69 X1.11
DAC.FLT: D3.11 X2.1 | length 27.5
  Top Layer w0.45: D3.11 44.925,60.075 cw(c44.925,59.5) 45.5,59.5 ccw(c46.5,59.5) 46.5,58.5 56.5,58.5 cw(c56.5,58) 57,58 57,55.72 ccw(c59.36,55.72) 59.36,53.36 X2.1
DAC.FMT: D3.16 X2.8 | length 34.6
  Top Layer w0.45: D3.16 47.175,63.325 cw(c47.175,62.5) 48,62.5 ccw(c50,62.5) 50,60.5 58,60.5 cw(c58,60) 58.5,60 ccw(c61,60) 61,57.5 72.28,57.5 cw(c72.28,55.9) X2.8
DAC.LRCK: D3.15 DD1.11 | length 58
  Top Layer w0.45: D3.15 45.025,62.675 v2(45.2,62.5) ; DD1.11 v2(80.855,45.28)
  Bottom Layer w0.45: v2(45.2,62.5) 44.5,61.8 44.5,47.25 46.65,45.1 50.25,45.1 65.405,45.1 ccw(c67.005,45.1) 67.005,43.5 79.728,43.5 ccw(c79.728,44.627) 80.855,44.627 v2(80.855,45.28)
DAC.LRCK_ext: DD1.9 X1.9 | length 24.9
  Top Layer w0.45: X1.9 76.42,25.42 ccw(c77.055,25.42) 77.055,24.785 82,24.785 ccw(c82,26.585) 83.8,26.585 83.8,32.375 ccw(c82.5,32.375) 82.5,33.675 78.96,33.675 cw(c78.96,34.31) 78.325,34.31 DD1.9
DAC.SCK: D3.12 DD1.17 | length 83.7
  Top Layer w0.45: v2(40,61.5) 40,61.25 40.525,60.725 D3.12 ; v2(71.975,42.385) DD1.17
  Bottom Layer w0.45: v2(40,61.5) 40,44.925 ccw(c42.54,44.925) 42.54,42.385 46.5,42.385 48,42.385 50.667,42.385 50.667,41.13 52.317,41.13 52.317,42.385 52.317,44.45 53.967,44.45 53.967,42.385 53.967,41.13 55.617,41.13 55.617,42.385 55.617,44.45 57.267,44.45 57.267,42.385 57.267,41.13 58.917,41.13 58.917,42.385 58.917,44.45 60.567,44.45 60.567,42.385 61.392,42.385 62.9,42.385 62.9,41.268 64.55,41.268 64.55,42.385 64.55,42.627 66.2,42.627 66.2,42.385 66.2,41.355 67.85,41.355 67.85,42.385 67.85,42.624 69.5,42.624 69.5,42.385 69.5,41.582 71.15,41.582 71.15,42.385 v2(71.975,42.385)
DAC.XSMT: D3.17 X2.10 | length 37.5
  Top Layer w0.45: D3.17 45.025,63.975 ; 45.076,63.975 47.525,63.975 cw(c47.525,62.5) 49,62.5 ccw(c50,62.5) 50,61.5 58.5,61.5 cw(c58.5,60.5) 59.5,60.5 ccw(c61.5,60.5) 61.5,58.5 73.88,58.5 cw(c73.88,55.96) 76.42,55.96 X2.10
GND: C2.2 C3.1 C4.1 C5.1 C6.1 C7.1 C8.1 C9.1 C10.2 C11.2 C12.2 C13.1 C14.1 C15.1 C16.1 C17.2 C18.1 C20.1 C21.1 C22.1 C23.2 C24.1 C25.2 C26.1 C27.1 C28.1 C29.1 C30.1 C32.2 C33.2 C34.2 C35.1 C36.2 C37.1 D1.2 D1.5 D2.1 D3.3 D3.9 D3.19 DD1.10 DD1.19 DD2.7 DD2.9 DD2.11 DD2.13 pad.0 R7.1 R9.1 R10.1 R14.1 R15.2 R16.1 R18.1 R20.1 SW1.1 SW2.1 SW3.1 X1.13 X1.14 X2.13 X2.14 X3.3 X4.3 X5.1 ZD2.2 ZD4.2 | length 31.2
  Top Layer w0.45: C36.2 v1(23,73.2) ; C8.1@26,45.5 ccw(c26,46) C8.1 ; C26.1@27.5,61.525 ccw(c27.525,61.525) C26.1 ; C23.2@28,69.375 ccw(c28.5,69.375) C23.2@28.5,68.875 ; C29.1 C29.1@32.71,77.45 ; D3.19 44.275,65.275 ; C30.1@47.475,68.475 C30.1 ; C34.2@52.1,68.475 cw(c52.1,68.075) C34.2@52.5,68.076 ; C34.2 C34.2@52.5,68.076 ; v1(52.5,70.5) C34.2@52.5,68.076 ; ZD2.2@68.072,91.5 ZD2.2 ; R9.1 74.35,87.275 R9.1@74.575,87.5 ; R9.1@74.825,87.5 75.05,87.275 R9.1@75.4,87.275
  Top Layer w0.65: R18.1@2.625,45.675 cw(c2.994,45.675) R18.1 ; C37.1 C35.1 C35.1@9.519,47.036 ; C27.1 12.192,47.058 ccw(c12.25,47.058) v1(12.25,47) ; R20.1@22.917,34.25 23.325,34.25 cw(c23.325,34.05) R20.1 ; D2.1 D2.1@24.935,91.05 ; C33.2 ccw(c28.55,77.95) C33.2@28.55,77.4 ; v1(29,50.5) C32.2 cw(c29.5,53.275) 29.5,53.775 C28.1 ; C29.1@32.45,77.4 ccw(c32.45,77.45) C29.1 ; C11.2@32.95,33.05 ccw(c33.45,33.05) C11.2 v1(37,32.55) ; DD1.19 v1(69.435,47.18) ; v1(74.5,47.75) v1@74.525,47.75
  other v1: 20.25,34.25 81.855,35.58 69.5,38.5 38.25,42.5 32.025,43.425 63.325,43.75 18.2,45.5 50.5,46.5 50.5,54.075 5.325,56.1 36,58.5 43.225,58.5 23.875,77.15
  other v2: 72.3,41.375 25.3,92.5
NetC1_1: C1.1 R3.1 | length 4
  Top Layer w0.45: R3.1 C1.1
NetC8_2: C8.2 C12.1 D1.1 | length 8.9
  Top Layer w0.45: C8.2 D1.1
  Top Layer w0.65: C12.1 C8.2
NetC19_1: C19.1 R13.1 | length 5.1
  Top Layer w0.45: R13.1 C19.1
NetC26_2: C26.2 D3.5 | length 7
  Top Layer w0.45: C26.2 cw(c32.3,61.5) 32.3,63.325 D3.5
NetC30_2: C30.2 C34.1 D3.18 | length 10
  Top Layer w0.45: D3.18 46.6,64.625 ccw(c46.6,65.525) C30.2 48.975,65.525 cw(c48.975,65) 49.5,65 ccw(c49.875,65) 49.875,64.625 C34.1
NetC31_1: C31.1 D3.4 | length 8.4
  Top Layer w0.45: D3.4 38.935,63.975 ccw(c38.935,66.515) 41.475,66.515 C31.1
NetC31_2: C31.2 D3.2 | length 4.9
  Top Layer w0.45: D3.2 37.679,65.275 ccw(c37.679,66.096) 38.5,66.096 38.5,68.475 cw(c38.525,68.475) C31.2
NetD3_6: D3.6 R19.1 | length 15.3
  Top Layer w0.45: R19.1@23,59.55 31.55,59.55 ccw(c31.55,61) 33,61 cw(c34.675,61) 34.675,62.675 D3.6
NetD4_1: D4.1 R17.1 R18.2 | length 6.5
  Top Layer w0.45: R18.2 R17.1 D4.1
NetLED1_2: LED1.2 R15.1 | length 5.3
  Bottom Layer w0.45: LED1.2 42.575,63.325 ccw(c42.575,65) 44.25,65 cw(c45,65) 45,65.75 R15.1
NetQ1_2: Q1.2 R9.2 | length 5.6
  Top Layer w0.45: Q1.2 R9.2
NetQ2_2: Q2.2 R16.2 | length 5
  Top Layer w0.45: Q2.2 19.125,29.875 R16.2
NetR4_1: R4.1 R5.1 SW1.2 | length 10.8
  Bottom Layer w0.45: R5.1 21.5,53 cw(c21,53) SW1.2 21,47.45 ccw(c21.95,47.45) R4.1
NetR6_1: R6.1 R8.1 SW2.2 | length 20.6
  Bottom Layer w0.45: SW2.2 44.1,90.5 cw(c44.1,90.1) R8.1 51,90.1 cw(c51,87.6) 53.5,87.6 53.5,87.59 ccw(c56.04,87.59) 56.04,85.05 R6.1
NetR11_1: R11.1 R12.1 SW3.2 | length 18.6
  Bottom Layer w0.65: SW3.2 cw(c13.04,88) 13.04,90 R12.1 13.5,92.5 23.45,92.5 R11.1
NetZD1_1: ZD1.1 ZD2.1 | length 4.2
  Top Layer w0.65: ZD2.1 55.7,89.3 ccw(c57,89.3) ZD1.1
NetZD3_1: ZD3.1 ZD4.1 | length 12.8
  Top Layer w0.65: ZD4.1 6.46,30 cw(c6.46,27.46) 9,27.46 ZD3.1
R_var: X1.1 X5.2 | length 17.1
  Bottom Layer w0.65: X1.1 66.26,27.64 ccw(c68.8,27.64) 68.8,25.1 79.017,25.1 cw(c79.017,24.417) 79.5,24.9 cw(c79.017,24.417) 79.7,24.417 X5.2 X5.2@79.7,22.89
pads on no net: D2.4 D3.7 D4.4 DD2.8 DD2.10 DD2.12 X2.11 X3.2 X4.2

## Polygon pours and split planes (outlines as drawn)
GND on Bottom Layer "Top Layer-No Net 2" (solid, remove dead copper, pour order 62): 1.005,86 19.45,86 19.45,69 1.005,69 1.005,20.6 84.305,20.6 84.305,93 1.005,93
no net on Bottom Layer "Top Layer-No Net 2" (solid, pour order 2): 6.393,36.636
GND on Top Layer "Top Layer-No Net 2" (solid, remove dead copper, pour order 36): 1,86 19.445,86 19.445,69 1,69 1,20.6 84.3,20.6 84.3,93 1,93

## Keep-outs
Keep-Out Layer:
  lines w0.1: 0,70 18.25,70 18.25,85 0,85 0,94 85.3,94 85.3,20 0,20 0,70 ; 0,70 0,70

## Silkscreen, mask and mechanical layers (free items; w line width, h text height)
Top Overlay:
  lines w0.15: 0.5,65 2,65 ; 7.5,44 10,44
  lines w0.2: 0.25,69.25 19,69.25 19,85.75 0.25,85.75
  text "Olya" at 40.5,52 h8
  text "27.01.2021" at 39.25,47.25 h4